# EAGLE board CP2102_Programmer_ESP32 (EAGLE 9.6.2)
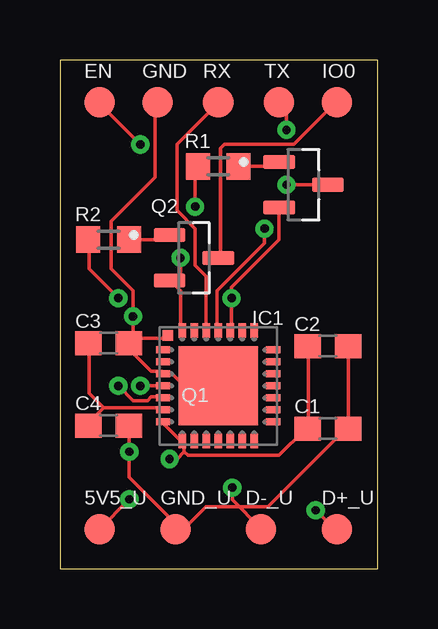
[diagram p0: board, top side]
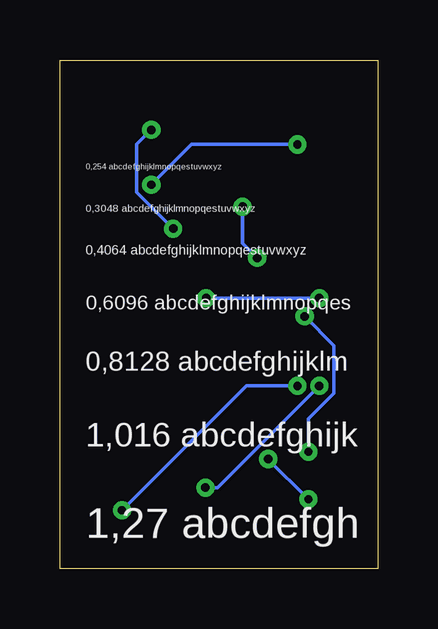
[diagram p1: board, bottom side, seen from below]

Size 13.26 x 21.2 mm. Coordinates in mm from the lower left corner, seen from the top.
Outline: 0,0 13.26,0 13.26,21.2 0,21.2 0,0
Copper layers (1*16): Top 0.035mm / dielectric 1.5mm / Bottom 0.035mm
Design rules "default": minimum track width 6mil, minimum drill 0.35mm, track to track 6mil, track to pad 6mil, pad to pad 6mil, via to via 6mil, smd to smd 6mil, copper to edge 40mil, drill to drill 6mil, minimum pad ring 10mil, minimum via ring 8mil, stop-mask expansion 4mil, vias tented up to drill 0mil, thermal gap 10mil

## Footprints (pad centres in the part's own frame; a part is rotated, then mirrored left to right if it is on the bottom)
B1,27 = smd 1.27 x 1.27: TP 0,0
C0603 = smd 1.1 x 1: 1 -0.85,0; 2 0.85,0
MLP28 = smd 0.6 x 0.3: 1 -2.3,1.5; 2 -2.3,1; 3 -2.3,0.5; 4 -2.3,0; 5 -2.3,-0.5; 6 -2.3,-1; 7 -2.3,-1.5; 15 2.3,-1.5; 16 2.3,-1; 17 2.3,-0.5; 18 2.3,0; 19 2.3,0.5; 20 2.3,1; 21 2.3,1.5 | smd 0.3 x 0.6: 8 -1.5,-2.3; 9 -1,-2.3; 10 -0.5,-2.3; 11 0,-2.3; 12 0.5,-2.3; 13 1,-2.3; 14 1.5,-2.3; 22 1.5,2.3; 23 1,2.3; 24 0.5,2.3; 25 0,2.3; 26 -0.5,2.3; 27 -1,2.3; 28 -1.5,2.3 | smd 3.3 x 3.3: EXP 0,0 | smd 0.435 x 0.435: M -2.103,2.103
SOT95P237X112-3N = smd 1.32 x 0.59: 1 -1.015,0.95; 2 -1.015,-0.95; 3 1.015,0
R0603 = smd 1 x 1.1: 1 -0.85,0; 2 0.85,0

## Placement (x,y rotation side)
5V5_U  TPB1,27  [B1,27]  1.65,1.65 0 top
C1  4.7nF  [C0603]  11.18,5.84 0 top
C2  100nF  [C0603]  11.18,9.27 0 top
C3  100nF  [C0603]  2.03,9.4 0 top
C4  100nF  [C0603]  2.03,5.97 0 top
D+_U  TPB1,27  [B1,27]  11.56,1.65 0 top
D-_U  TPB1,27  [B1,27]  8.38,1.65 0 top
EN  TPB1,27  [B1,27]  1.65,19.43 0 top
GND  TPB1,27  [B1,27]  4.06,19.43 0 top
GND_U  TPB1,27  [B1,27]  4.83,1.65 0 top
IC1  CP2101  [MLP28]  6.6,7.62 0 top
IO0  TPB1,27  [B1,27]  11.56,19.43 0 top
Q1  BC817-40_RFG  [SOT95P237X112-3N]  10.16,16 0 top
Q2  BC817-40_RFG  [SOT95P237X112-3N]  5.59,12.95 0 top
R1  10k  [R0603]  6.6,16.76 0 top
R2  10k  [R0603]  2.03,13.72 0 top
RX  TPB1,27  [B1,27]  6.6,19.43 0 top
TX  TPB1,27  [B1,27]  9.14,19.43 0 top

## Library data of the parts
5V5_U D+_U D-_U EN GND GND_U IO0 RX TX = testpad
C1-C4 = rcl; SPICEPREFIX: C
IC1 = silabs; MF: FARNELL; MPN: CP2102-GM; OC_FARNELL: 9282130; OC_NEWARK: 30K5635
Q1 Q2 = BC817-40_RFG; AVAILABILITY: In Stock; DESCRIPTION: SOT-23, 50V, 0.5A, NPN Bipolar Transistor; MF: Taiwan Semiconductor; MP: BC817-40 RFG; PACKAGE: SOT-23 Taiwan Semiconductor; PRICE: None; PURCHASE-URL: https://pricing.snapeda.com/search/part/BC817-40 RFG/?ref=eda
R1 R2 = rcl; SPICEPREFIX: R

## Nets
N$1: C3.1 C4.1 IC1.6
N$3: IC1.26 RX.TP
N$4: IC1.25 TX.TP
N$5: D+_U.TP IC1.4
N$6: D-_U.TP IC1.5
N$7: IC1.28 Q2.2 R1.1
N$8: 5V5_U.TP C1.1 C2.1 IC1.7 IC1.8
N$9: IC1.24 Q1.2 R2.1
N$10: C1.2 C2.2 C3.2 C4.2 GND.TP GND_U.TP IC1.3 IC1.EXP IC1.M
N$11: IO0.TP Q2.3
N$13: Q2.1 R2.2
N$14: Q1.1 R1.2
N$15: EN.TP Q1.3

## Tracks (layer width: path | path; a pad name or v marks a point on that pad's centre or on a via)
N$1
  Top 0.152: 1.83,6.71 4.27,6.71 IC1.6 | 1.83,6.71 1.22,6.1 C4.1 | 1.83,6.71 1.22,7.32 1.22,9.3 C3.1
N$3
  Top 0.152: IC1.26 6.1,10.06 6.1,12.19 5.64,12.65 5.64,14.17 4.88,14.94 4.88,17.68 6.55,19.36 RX.TP
N$4  (via drill 0.35)
  Top 0.152: v8.53,14.17 8.53,13.56 6.55,11.58 6.55,10.06 IC1.25 | v9.45,18.29 9.45,19.05 9.14,19.36 TX.TP
  Bottom 0.152: v8.53,14.17 10.06,15.7 10.06,17.68 v9.45,18.29
N$5  (via drill 0.35)
  Top 0.152: v3.35,7.62 IC1.4 | v10.67,2.44 11.43,1.68 D+_U.TP
  Bottom 0.152: v3.35,7.62 5.49,7.62 v10.67,2.44
N$6  (via drill 0.35)
  Top 0.152: v2.44,7.62 3.05,7.01 3.66,7.01 3.81,7.16 4.27,7.16 IC1.5 | v7.19,3.38 7.19,2.87 8.38,1.68 D-_U.TP
  Bottom 0.152: v2.44,7.62 6.68,3.38 v7.19,3.38
N$7  (via drill 0.35)
  Top 0.152: IC1.28 5.03,10.06 5.03,11.58 4.72,11.89 Q2.2 4.72,12.04 5.03,12.34 v5.03,12.95 | v5.64,15.09 5.64,16.76 R1.1
  Bottom 0.152: v5.64,15.09 5.64,13.56 v5.03,12.95
N$8  (via drill 0.35)
  Top 0.152: IC1.7 4.27,6.1 5.03,5.33 IC1.8 5.18,5.18 5.18,4.88 | C2.1 10.36,9.14 10.36,5.94 C1.1 10.21,5.79 9.14,4.72 5.33,4.72 5.18,4.88 | v2.9,2.9 5V5_U.TP | v4.57,4.57 4.88,4.57 5.18,4.88
  Bottom 0.152: v4.57,4.57 v2.9,2.9
N$9  (via drill 0.35)
  Top 0.152: IC1.24 7.16,10.06 v7.16,11.28 7.16,11.73 9.14,13.72 9.14,14.94 Q1.2 | v2.44,11.28 1.22,12.5 1.22,13.72 R2.1
  Bottom 0.152: v7.16,11.28 v2.44,11.28
N$10  (via drill 0.35)
  Top 0.152: C2.2 12.04,9.14 12.04,5.94 C1.2 11.89,5.79 8.69,2.59 6.1,2.59 5.27,1.76 GND_U.TP 4.6,2.11 2.9,3.81 v2.9,4.88 2.9,5.94 C4.2 | 3.05,9.6 4.42,9.6 IC1.M | 3.05,9.6 2.9,9.45 C3.2 | C3.2 2.74,9.3 3.81,8.23 4.27,8.23 IC1.3 4.42,8.08 4.72,8.08 5.18,7.62 IC1.EXP | 3.05,9.6 v3.05,10.52 3.05,11.58 2.13,12.5 2.13,14.48 3.96,16.31 3.96,19.36 GND.TP | 3.05,9.6 C3.2
  Bottom 0.152: v2.9,4.88 2.9,6.25 1.83,7.32 1.83,9.3 v3.05,10.52
N$11
  Top 0.152: IO0.TP 11.43,19.36 9.75,17.68 6.86,17.68 6.71,17.53 6.71,12.95 Q2.3
N$13
  Top 0.152: R2.2 4.42,13.72 4.57,13.87 Q2.1
N$14
  Top 0.152: R1.2 8.99,16.76 9.14,16.92 Q1.1
N$15  (via drill 0.35)
  Top 0.152: v3.35,17.68 1.68,19.36 EN.TP | Q1.3 v9.45,16
  Bottom 0.152: v3.35,17.68 7.77,17.68 v9.45,16

## Text on the board
bNames: 0,254 abcdefghijklmnopqestuvwxyz | 0,3048 abcdefghijklmnopqestuvwxyz | 0,4064 abcdefghijklmnopqestuvwxyz | 0,6096 abcdefghijklmnopqes | 0,8128 abcdefghijklm | 1,016 abcdefghijk | 1,27 abcdefgh